# Altium PCB Radio.PCBDOC
Units mm, origin at the board's own origin, x right, y up, seen from the top; angles counter-clockwise.
Board outline 152.4 x 101.6 mm, 2 copper layers (Top Layer, Bottom Layer); 24 components, 43 nets, 109 pads, 1 vias.
Unrouted connection lines stored in the file: 1.
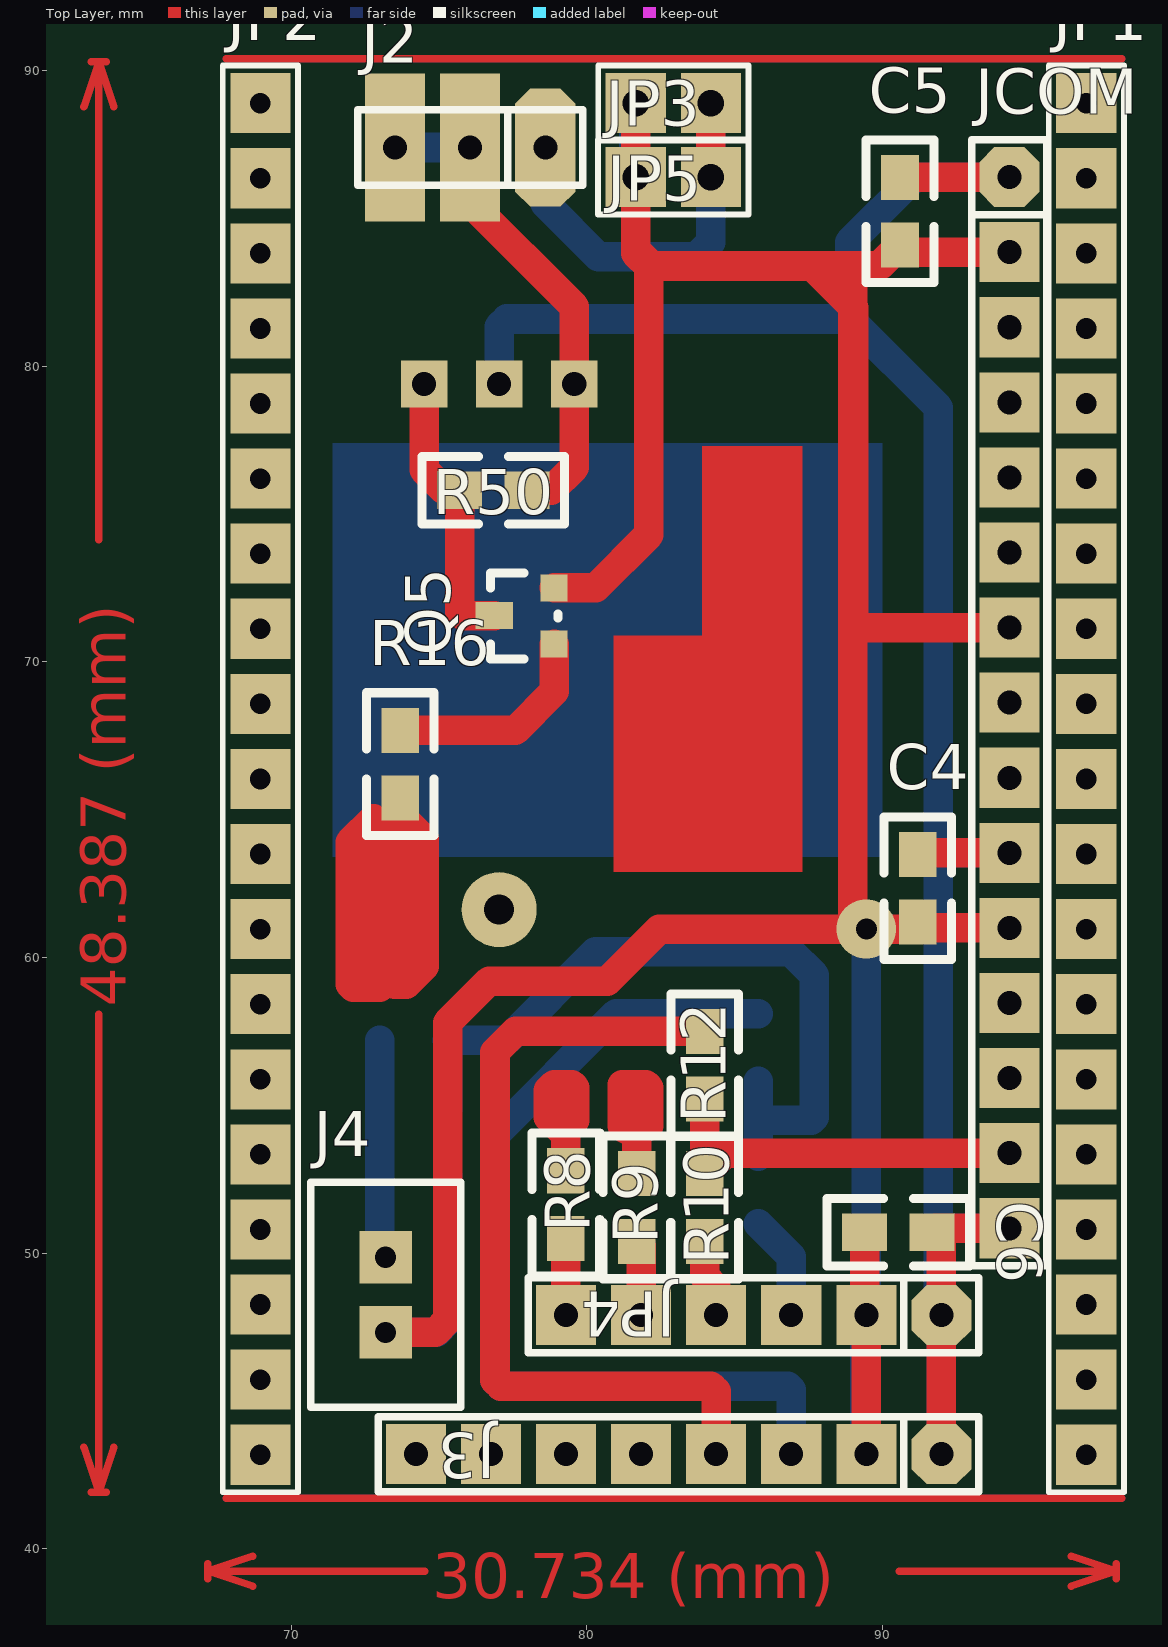
[diagram p0: Top Layer view]
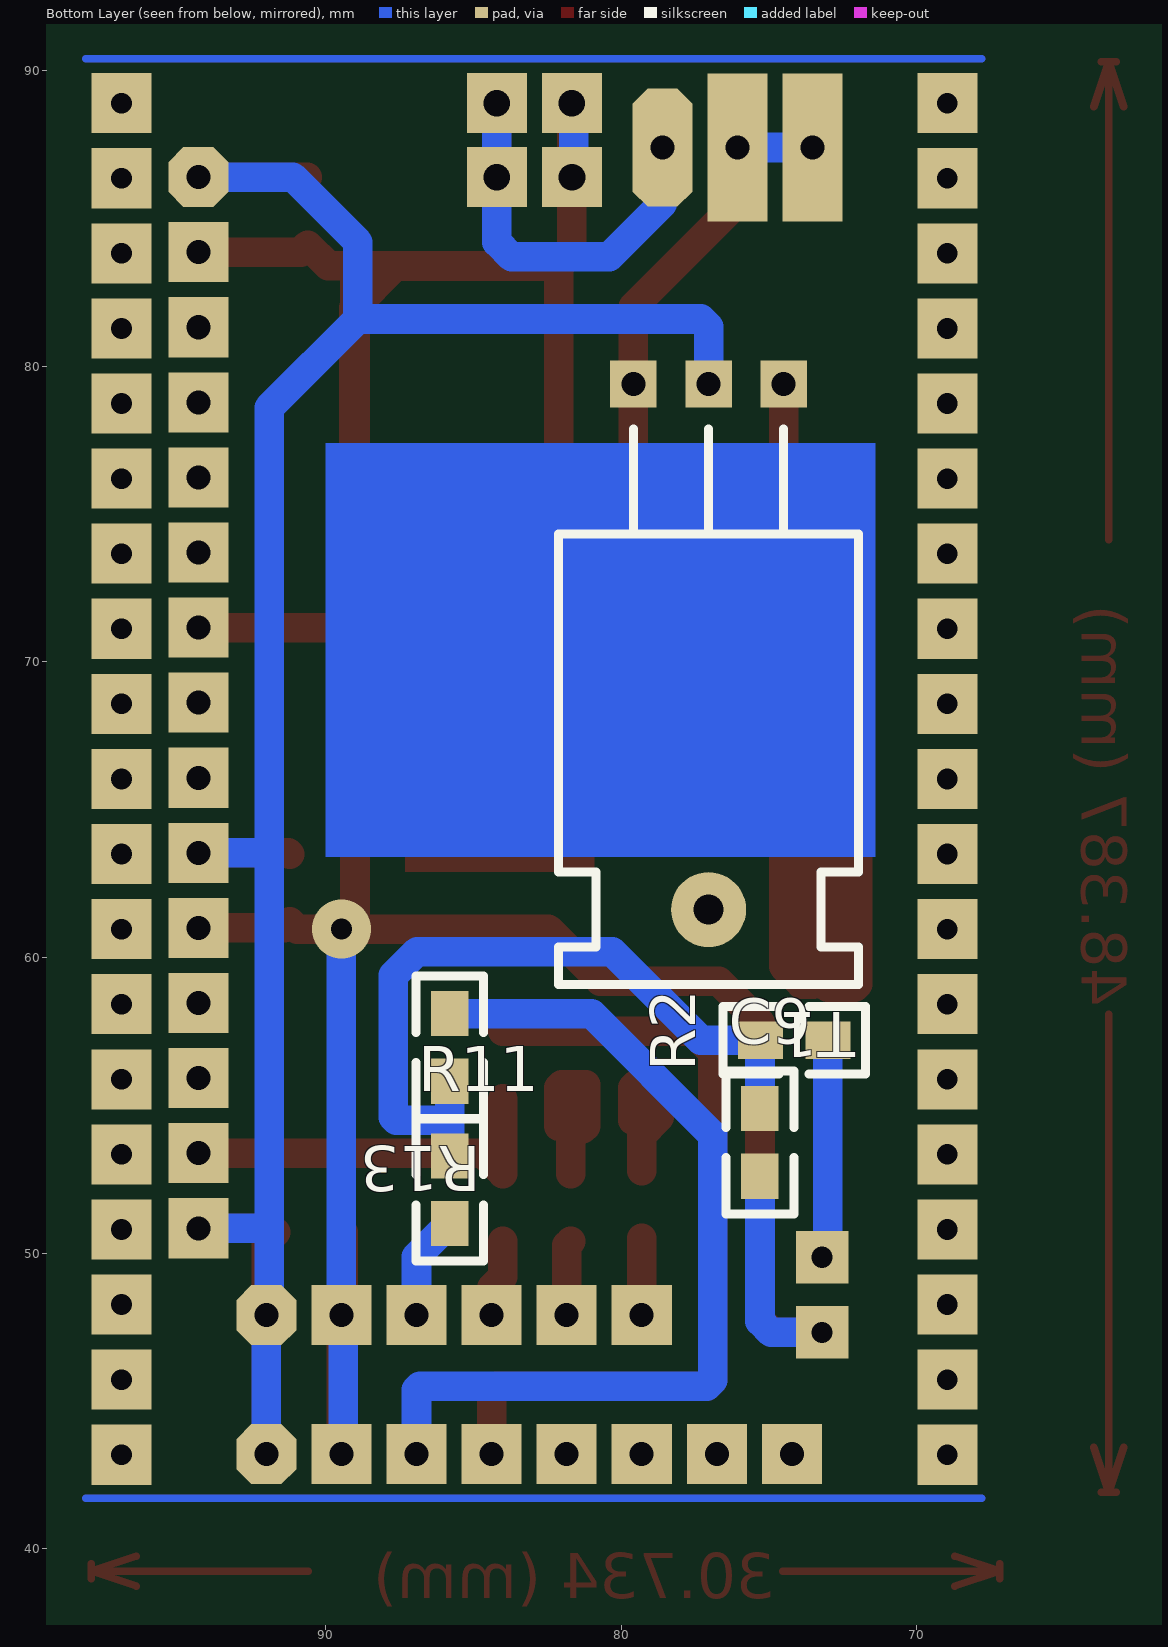
[diagram p1: Bottom Layer view, seen from below]

## Layer stack, top to bottom
Top Layer: signal copper 0.0356
Dielectric: dielectric 0.32, FR-4, Dk 4.8
Bottom Layer: signal copper 0.0356

## Board outline
25.4,25.4 177.8,25.4 177.8,127 25.4,127

## Design rules (kind name [scope] priority, off if disabled: settings)
Clearance [All] p1: gap=0.3
ComponentClearance [All] p1 off: gap=0.254 collisioncheckmode=0
PolygonConnect [All] p1: connectstyle=Relief reliefconductorwidth=0.254 reliefentries=4 polygonreliefangle="90 Angle"
RoutingLayers [All] p1: top layer=Horizontal bottom layer=Vertical
RoutingVias [All] p1: holewidth=0.711 width=1.27 viastyle="Through Hole" minholewidth=0.711 minwidth=1.27 maxholewidth=0.711 maxwidth=1.27
SolderMaskExpansion [All] p1: expansion=0.102
TestPointUsage [All] p1: valid=0 allowmultiple=FALSE
Testpoint [All] p1: side=15 testpointundercomponent=TRUE minsize=1.016 maxsize=2.54 preferedsize=1.524 minholesize=0 maxholesize=1.016 preferedholesize=0.813 testpointgrid=0.025 style=1023 order=1234567890
Width [All] p1: maxlimit=1 minlimit=0.3 preferedwidth=0.3 toplayer_minwidth=0.5 toplayer_prefwidth=1 bottomlayer_minwidth=0.5 bottomlayer_prefwidth=1 minimp=50.000000 maximp=50.000000 favimp=50.000000
16 further rules are at their usual default settings.

## Components (designator, comment, footprint, x,y, rotation, side; value= is the part's Value field where it differs from the comment)
C4 "100nF" 0805 91.2,61.2 r90 top
C5 "100nF" 0805 90.6,84.1 r90 top
C6 "100nF" 0805 89.4,50.7 r0 top
C9 "220pF" 0805 75.3,52.6 r90 bottom
J2 "INT" TSIP3 78.6,87.4 r180 top
J3 "TCON8" TSIP8 92,43.2 r180 top
J4 "COM" CON2 73.2,52.4 r90 top
JCOM "REC433" TSIP15 94.3,86.4 r0 top
JP1 "Header 19" HDR1X19 96.901,43.18 r90 top
JP2 "Header 19" HDR1X19 68.961,43.18 r90 top
JP3 "Header 2" HDR1X2 84.201,88.9 r180 top
JP4 "Header 6" TSIP6 92,47.9 r180 top
JP5 "Header 2" HDR1X2 84.2,86.4 r180 top
Q5 "BSS123" SOT-23 78.9,70.6 r90 top
R2 "560" 0805 73,57.2 r0 bottom
R8 "Res2" 0805 79.3,50.5 r90 top
R9 "Res2" 0805 81.7,50.4 r90 top
R10 "Res2" 0805 84,50.4 r90 top
R11 "Res2" 0805 85.8,51 r90 bottom
R12 "Res2" 0805 84,57.5 r270 top
R13 "Res2" 0805 85.8,58.1 r270 bottom
R16 "1K" 0805 73.7,65.4 r90 top
R50 "1K" 0805 75.7,75.8 r0 top
T1 "MTP2955V" TTO220C 74.5,79.4 r0 bottom

## Footprints (in the part's own frame and the unit in brackets; to place one, negate y for a bottom-side part, rotate by r counter-clockwise, add the part's x,y. Pads: shape width x height; smd on the part's side, far side on the other; paste and mask are expansions set on the pad)
0805 [mil]
  rect 60x50 smd: 1(0,0) 2(90,0)
  silkscreen extent -50,-45 140,45
CON2 [mil]
  rect 70x70 hole 28: 1(-200,0) 2(-100,0)
  silkscreen extent -300,-100 0,100
HDR1X2 [mil] "Connector; Header; 2 Position"
  rect 80x80 hole 35.43: 1(0,0) 2(100,0)
  silkscreen extent -50,-50 150,50
HDR1X19 [mil] "Connector; Header; 19 Position"
  rect 80x80 hole 27.56: 1(0,0) 2(100,0) 3(200,0) 4(300,0) 5(400,0) 6(500,0) 7(600,0) 8(700,0) 9(800,0) 10(900,0) 11(1000,0) 12(1100,0) 13(1200,0) 14(1300,0) 15(1400,0) 16(1500,0) 17(1600,0) 18(1700,0) 19(1800,0)
  silkscreen extent -50,-50 1850,50
SOT-23 [mil]
  rect 36x36 smd: 1(0,0) 2(75,0)
  rect 36x50 smd: 3(38,80)
  silkscreen extent -20,-5 95,85
TSIP3 [mil]
  oct 80x157.48 hole 32: 1(0,0)
  rect 80x196.85 hole 32: 2(100,0) 3(200,0)
  silkscreen extent -50,-50 250,50
TSIP6 [mil]
  oct 80x80 hole 32: 1(0,0)
  rect 80x80 hole 32: 2(100,0) 3(200,0) 4(300,0) 5(400,0) 6(500,0)
  silkscreen extent -50,-50 550,50
TSIP8 [mil]
  oct 80x80 hole 32: 1(0,0)
  rect 80x80 hole 32: 2(100,0) 3(200,0) 4(300,0) 5(400,0) 6(500,0) 7(600,0) 8(700,0)
  silkscreen extent -50,-50 750,50
TSIP15 [mil]
  oct 80x80 hole 32: 1(0,0)
  rect 80x80 hole 32: 2(0,-100) 3(0,-200) 4(0,-300) 5(0,-400) 6(0,-500) 7(0,-600) 8(0,-700) 9(0,-800) 10(0,-900) 11(0,-1000) 12(0,-1100) 13(0,-1200) 14(0,-1300) 15(0,-1400)
  silkscreen extent -50,-1450 50,50
TTO220C [mil]
  round 100 hole 40: 0(100,700)
  rect 62x62 hole 32: 1(0,0) 2(100,0) 3(200,0)
  silkscreen extent -100,60 300,800

## Part data
C4 C5 C6 C9: library part CAP
J2: library part TCON3
J4: library part CON2
JCOM: library part CON15
JP1 JP2: "Header, 19-Pin"
JP3 JP5: "Header, 2-Pin"
JP4: "Header, 6-Pin"
R2: library part RES2
R8 R9 R10 R11 R12 R13: "Resistor"
R16 R50: library part TRESIST

## Via types
v1: diameter 2, hole 0.711, Top Layer to Bottom Layer, 1 vias

## Nets (pads, with @x,y where several pads share a name; then routed paths per layer and width w, separated by ;. In a path a pad name is that pad's centre, name@x,y a point inside that pad or via, vN(x,y) a via of type N, cw(c..) or ccw(c..) an arc to the next point about the centre after c; other vN are vias at no path point)
5V: C4.2 C5.2 C6.2 J3.1 JCOM.1 JCOM.10 JCOM.15 JP4.1 T1.2 | length 152.6
  Top Layer w1: J3.1@92,43.7 JP4.1@92,47.3 ; C5.2@90.614,86.4 JCOM.1 ; C5.2@90.614,86.4 JCOM.1 ; C5.2@90.614,86.4 JCOM.1 ; C4.2 C4.2@91.254,63.54 ; C4.2 C4.2@91.254,63.54 ; C4.2 C4.2@91.254,63.54 ; C4.2@91.254,63.54 JCOM.10 ; C4.2@91.254,63.54 JCOM.10 ; C4.2@91.254,63.54 JCOM.10 ; C6.2 C6.2@92,50.386 ; C6.2 C6.2@91.826,50.84 ; C6.2 C6.2@92,50.386 ; C6.2 C6.2@91.826,50.84 ; C6.2 C6.2@91.826,50.84 ; C6.2 C6.2@92,50.386 ; C6.2@91.826,50.84 JCOM.15 ; C6.2@91.826,50.84 JCOM.15 ; C6.2@91.826,50.84 JCOM.15 ; JP4.1 C6.2@92,50.386 ; JP4.1 C6.2@92,50.386 ; JP4.1 C6.2@92,50.386
  Bottom Layer w1: 77.04,81.34 T1.2 77.04,81.34 ; 77.04,81.34 77.3,81.6 88.9,81.6 ; 88.9,81.6 88.9,84.2 91.1,86.4 ; 88.9,81.6 91.9,78.6 ; 91.1,86.4 JCOM.1 91.1,86.4 ; 91.9,51.1 92.16,50.84 ; 91.9,51.1 92.16,50.84 ; 91.9,51.1 91.9,63.3 ; 91.9,51.1 91.9,48.5 91.9,78.6 ; 91.9,63.3 92.14,63.54 ; 91.9,63.3 92.14,63.54 ; 91.9,63.3 91.9,78.6 ; 92.14,63.54 JCOM.10 92.14,63.54 ; 92.16,50.84 JCOM.15 92.16,50.84 ; J3.1 JP4.1 J3.1
/RST: J3.5
ANT: JCOM.3
EN_RX: R8.2 R16.1 | length 34.8
  Top Layer w1: 72.8,64.7 72,63.9 72,59.1 72.1,59 73,59 73,64.3 73.5,63.8 73.5,59.1 73.9,59.1 74.5,59.7 74.5,64 74,64.5 ; 79.6,54.5 79.6,55.6 79.5,55.7 78.9,55.7 78.7,55.5 78.7,54.6 79.3,54 ; 73.7,64.5 R16.1 ; 73.7,64.5 74,64.5 ; 73.7,64.5 R16.1 ; 73.7,64.5 R16.1 ; 73.7,64.5 74,64.5 ; R8.2 79.3,54 ; R8.2 79.3,54 ; R8.2 79.3,54
EN_TX: R9.2 | length 7.9
  Top Layer w1: 82.1,54.3 82.1,55.6 82,55.7 81.2,55.7 81.2,54.3 81.3,54.2 81.4,54.2 81.7,53.9 ; R9.2 81.7,53.9 ; R9.2 81.7,53.9 ; R9.2 81.7,53.9
GND: C4.1 C5.1 C6.1 C9.1 J3.2 J4.1 JCOM.2 JCOM.7 JCOM.11 JP3.2 JP4.2 JP5.2 Q5.2 | length 264
  Top Layer w1: 74.88,47.32 J4.1 74.88,47.32 ; 74.88,47.32 75.3,47.74 75.3,57.8 76.7,59.2 80.7,59.2 82.46,60.96 ; 80.305,72.505 Q5.2 80.305,72.505 ; 80.305,72.505 82.1,74.3 ; 81.66,83.821 JP5.2 81.66,83.821 ; 81.66,83.821 82.093,83.388 ; 81.661,83.939 JP3.2 JP5.2 81.661,83.939 ; 81.661,83.939 82.1,83.5 ; 82.093,83.388 87.63,83.388 ; 82.093,83.388 82.1,83.388 ; 82.1,74.3 82.1,83.5 ; 82.1,74.3 82.1,83.388 ; 82.1,83.388 82.1,83.4 ; 82.1,83.388 87.63,83.388 ; 82.1,83.4 89.9,83.4 ; 82.1,83.4 89,83.4 ; 82.1,83.4 82.1,83.5 ; 82.46,60.96 C4.1@90.96,60.96 ; 82.46,60.96 v1@89.44,60.96 ; 87.63,83.388 89.04,81.978 ; 87.63,83.388 89,82.018 ; v1@89,61.4 v1@89.44,60.96 ; v1@89,61.4 89,83.4 ; v1@89,61.4 89,82.018 ; v1@89,61.4 v1@89.44,60.96 ; 89,82.018 89,83.4 ; 89,82.018 89.04,81.978 ; 89,83.4 89.9,83.4 ; 89.04,71.16 JCOM.7 89.04,71.16 ; 89.04,71.16 89.04,81.978 ; JP4.2@89.4,47.96 JP4.2 ; JP4.2@89.4,47.96 C6.1 ; JP4.2@89.4,47.96 JP4.2 ; JP4.2@89.4,47.96 C6.1 ; JP4.2@89.4,47.96 C6.1 ; JP4.2@89.4,47.96 JP4.2 ; v1@89.44,60.96 v1(89.46,60.96) C4.1@90.96,60.96 ; JP4.2 J3.2 JP4.2 ; 89.9,83.4 C5.1 ; 89.9,83.4 C5.1 ; C5.1 C5.1@90.84,83.86 ; C5.1 C5.1@90.84,83.86 ; C5.1@90.84,83.86 JCOM.2 C5.1@90.84,83.86 ; C4.1@90.96,60.96 C4.1 ; C4.1@90.96,60.96 C4.1 ; C4.1 C4.1@91.4,61 ; C4.1 C4.1@91.4,61 ; C4.1@91.4,61 JCOM.11 C4.1@91.4,61
  Bottom Layer w1: JP3.2@81.6,88.4 JP5.2@81.6,86.9 ; J3.2@89.4,43.8 JP4.2@89.4,47.4 ; J4.1 74.92,47.32 ; J4.1 74.92,47.32 ; J4.1 74.92,47.32 ; 74.92,47.32 75.3,47.7 ; 75.3,47.7 C9.1 ; 75.3,47.7 C9.1 ; 75.3,47.7 C9.1 ; JP5.2@81.6,86.9 JP5.2@81.66,86.9 ; JP5.2@81.6,86.9 JP5.2@81.66,86.9 ; JP5.2@81.66,86.9 JP5.2 JP5.2@81.66,86.9 ; JP4.2 v1(89.46,60.96) JP4.2
MISO: J3.7
MOSI: J3.8
NetJ2_1: J2.1 JP3.1 JP5.1 | length 34.7
  Top Layer w1: JP5.1 84.2,88.4 JP5.1
  Bottom Layer w1: J2.1@78.6,85.5 J2.1 ; J2.1@78.6,85.5 J2.1 ; J2.1@78.6,85.5 J2.1 ; J2.1@78.6,85.5 80.4,83.7 83.7,83.7 84.201,84.201 ; 84.201,84.201 JP5.1 ; 84.201,84.201 JP5.1 ; 84.201,84.201 JP3.1 ; 84.201,84.201 JP3.1 ; 84.201,84.201 JP5.1 ; JP5.1 JP3.1
NetJ3_3: J3.3 R13.1 | length 45.2
  Bottom Layer w1: 81,58.1 R13.1 ; 81,58.1 R13.1 ; 81,58.1 R13.1 ; 81,58.1 76.9,54 76.9,45.7 77.1,45.5 86.8,45.5 86.92,45.38 ; J3.3 86.92,45.38 ; J3.3 86.92,45.38 ; J3.3 86.92,45.38
NetJ3_4: J3.4 R12.1 | length 45.3
  Top Layer w1: 77.6,57.5 R12.1 ; 77.6,57.5 R12.1 ; 77.6,57.5 R12.1 ; 77.6,57.5 76.9,56.8 76.9,45.7 77.1,45.5 84.2,45.5 84.38,45.32 ; J3.4 84.38,45.32 ; J3.4 84.38,45.32 ; J3.4 84.38,45.32
NetJ4_2: J4.2 R2.1 | length 22.8
  Bottom Layer w1: J4.2@72.84,49.86 J4.2 ; J4.2@72.84,49.86 J4.2 ; J4.2@72.84,49.86 J4.2 ; J4.2@72.84,49.86 J4.2@73,50.02 ; J4.2@73,50.02 R2.1 ; J4.2@73,50.02 R2.1 ; J4.2@73,50.02 R2.1
NetJP4_3: JP4.3 R11.1 | length 10.7
  Bottom Layer w1: R11.1 86.92,49.88 ; R11.1 86.92,49.88 ; R11.1 86.92,49.88 ; JP4.3 86.92,49.88 ; JP4.3 86.92,49.88 ; JP4.3 86.92,49.88
NetJP4_4: JP4.4 R10.1 | length 6.9
  Top Layer w1: 84,49.2 R10.1 ; 84,49.2 R10.1 ; 84,49.2 R10.1 ; 84,49.2 JP4.4@84.38,48.82 ; JP4.4 JP4.4@84.38,48.82 ; JP4.4 JP4.4@84.38,48.82 ; JP4.4 JP4.4@84.38,48.82
NetJP4_5: JP4.5 R9.1 | length 7.7
  Top Layer w1: R9.1 R9.1@81.84,50.26 ; R9.1 R9.1@81.84,50.26 ; R9.1 R9.1@81.84,50.26 ; JP4.5 R9.1@81.84,50.26 ; JP4.5 R9.1@81.84,50.26 ; JP4.5 R9.1@81.84,50.26
NetJP4_6: JP4.6 R8.1 | length 7.8
  Top Layer w1: JP4.6 R8.1 ; JP4.6 R8.1 ; JP4.6 R8.1
NetQ5_1: Q5.1 R16.2 | length 18.3
  Top Layer w1: R16.2 77.586,67.686 ; R16.2 77.586,67.686 ; R16.2 77.586,67.686 ; 77.586,67.686 78.9,69 ; 78.9,69 Q5.1 ; 78.9,69 Q5.1 ; 78.9,69 Q5.1
NetQ5_3: Q5.3 R50.1 T1.1 | length 26.8
  Top Layer w1: 74.5,76.5 T1.1 ; 74.5,76.5 T1.1 ; 74.5,76.5 T1.1 ; 74.5,76.5 R50.1@75.2,75.8 ; R50.1@75.2,75.8 R50.1 ; R50.1@75.2,75.8 R50.1 ; R50.1@75.2,75.8 R50.1 ; 75.7,71.7 R50.1 ; 75.7,71.7 R50.1 ; 75.7,71.7 R50.1 ; 75.7,71.7 75.835,71.565 ; 75.835,71.565 Q5.3 ; 75.835,71.565 Q5.3 ; 75.835,71.565 Q5.3
RX_RADIO: JCOM.14 R10.2 R12.2 | length 39.3
  Top Layer w1: R10.2 R12.2 ; R10.2 84.694,53.38 ; R10.2 R12.2 ; R10.2 84.694,53.38 ; R10.2 84.694,53.38 ; R10.2 R12.2 ; 84.694,53.38 JCOM.14 ; 84.694,53.38 JCOM.14 ; 84.694,53.38 JCOM.14
SCK: J3.6
SERVO1: JP2.19
SERVO2: JP2.17
SERVO3: JP2.15
SERVO4: JP2.13
SERVO5: JP2.11
SERVO6: JP2.9
SERVO7: JP2.7
SERVO8: JP2.5
SERVO9: JP2.3
SERVO10: JP2.1
SERVO11: JP1.1
SERVO12: JP1.3
SERVO13: JP1.5
SERVO14: JP1.7
SERVO15: JP1.9
SERVO16: JP1.11
SERVO17: JP1.13
SERVO18: JP1.15
SERVO19: JP1.17
SERVO20: JP1.19
TEST: JCOM.13
TX_RADIO: C9.2 R2.2 R11.2 R13.2 | length 45.3
  Bottom Layer w1: R2.2 77.3,57.2 ; R2.2 77.3,57.2 ; R2.2 77.3,57.2 ; C9.2 R2.2@75.3,57.186 ; C9.2 R2.2@75.3,57.186 ; C9.2 R2.2@75.3,57.186 ; 77.3,57.2 80.3,60.2 86.9,60.2 87.7,59.4 87.7,54.6 87.6,54.5 ; R11.2 85.8,54.5 ; R11.2 85.8,54.5 ; R11.2 R13.2 ; R11.2 R13.2 ; R11.2 85.8,54.5 ; 85.8,54.5 87.6,54.5 ; 85.8,54.5 87.6,54.5 ; 85.8,54.5 87.6,54.5 ; 85.8,54.5 R13.2
VCC: J2.2 J2.3 R50.2 T1.3 | length 43.7
  Top Layer w1: J2.2@76.06,85.54 J2.2 ; J2.2@76.06,85.54 J2.2 ; J2.2@76.06,85.54 J2.2 ; J2.2@76.06,85.54 79.58,82.02 ; R50.2 78.8,75.8 ; R50.2 78.8,75.8 ; R50.2 78.8,75.8 ; 78.8,75.8 79.58,76.58 ; 79.58,76.58 T1.3 ; 79.58,76.58 T1.3 ; 79.58,76.58 79.58,82.02 ; 79.58,76.58 79.58,82.02 ; 79.58,76.58 T1.3 ; T1.3 79.58,82.02
  Bottom Layer w1: J2.3 J2.2 ; J2.3 J2.2 ; J2.3 J2.2
pads on no net: JCOM.4 JCOM.5 JCOM.6 JCOM.8 JCOM.9 JCOM.12 JP1.2 JP1.4 JP1.6 JP1.8 JP1.10 JP1.12 JP1.14 JP1.16 JP1.18 JP2.2 JP2.4 JP2.6 JP2.8 JP2.10 JP2.12 JP2.14 JP2.16 JP2.18 T1.0
copper on no net: | length 61.9
  Top Layer w0.254: 62.992,43.434 63.5,41.91 ; 62.992,88.773 63.5,90.297 ; 63.246,41.91 63.754,41.91 ; 63.246,90.297 63.754,90.297 ; 63.5,58.08 63.5,41.91 ; 63.5,74.127 63.5,90.297 ; 64.008,43.434 63.5,41.91 ; 64.008,88.773 63.5,90.297 ; 67.183,38.989 67.183,39.497 ; 68.707,38.735 67.183,39.243 ; 68.707,39.751 67.183,39.243 ; 74.526,39.243 67.183,39.243 ; 90.574,39.243 97.917,39.243 ; 96.393,38.735 97.917,39.243 ; 96.393,39.751 97.917,39.243 ; 97.917,38.989 97.917,39.497

## Other copper
Top Layer:
  rectangle: 80.9,62.9 85.2,70.9
  rectangle: 83.9,62.9 87.3,77.3
  text "48.387 (mm)" at 64.414,58.334 h1.52 r90
  text "30.734 (mm)" at 74.78,38.329 h1.52
Bottom Layer:
  rectangle: 71.4,63.4 90,77.4
Multi-Layer:
  lines w0.254: 67.8,41.7 98.1,41.7 ; 67.8,90.4 98.1,90.4